# Altium PCB ZD-STM32-ZOUYU.PcbDoc (part 7 of 8)
Units mm, origin at the board's own origin, x right, y up, seen from the top; angles counter-clockwise.
Board outline 251.84 x 139.06 mm, 2 copper layers (Top Layer, Bottom Layer); 254 components, 246 nets, 1172 pads, 599 vias.
Unrouted connection lines stored in the file: 9.
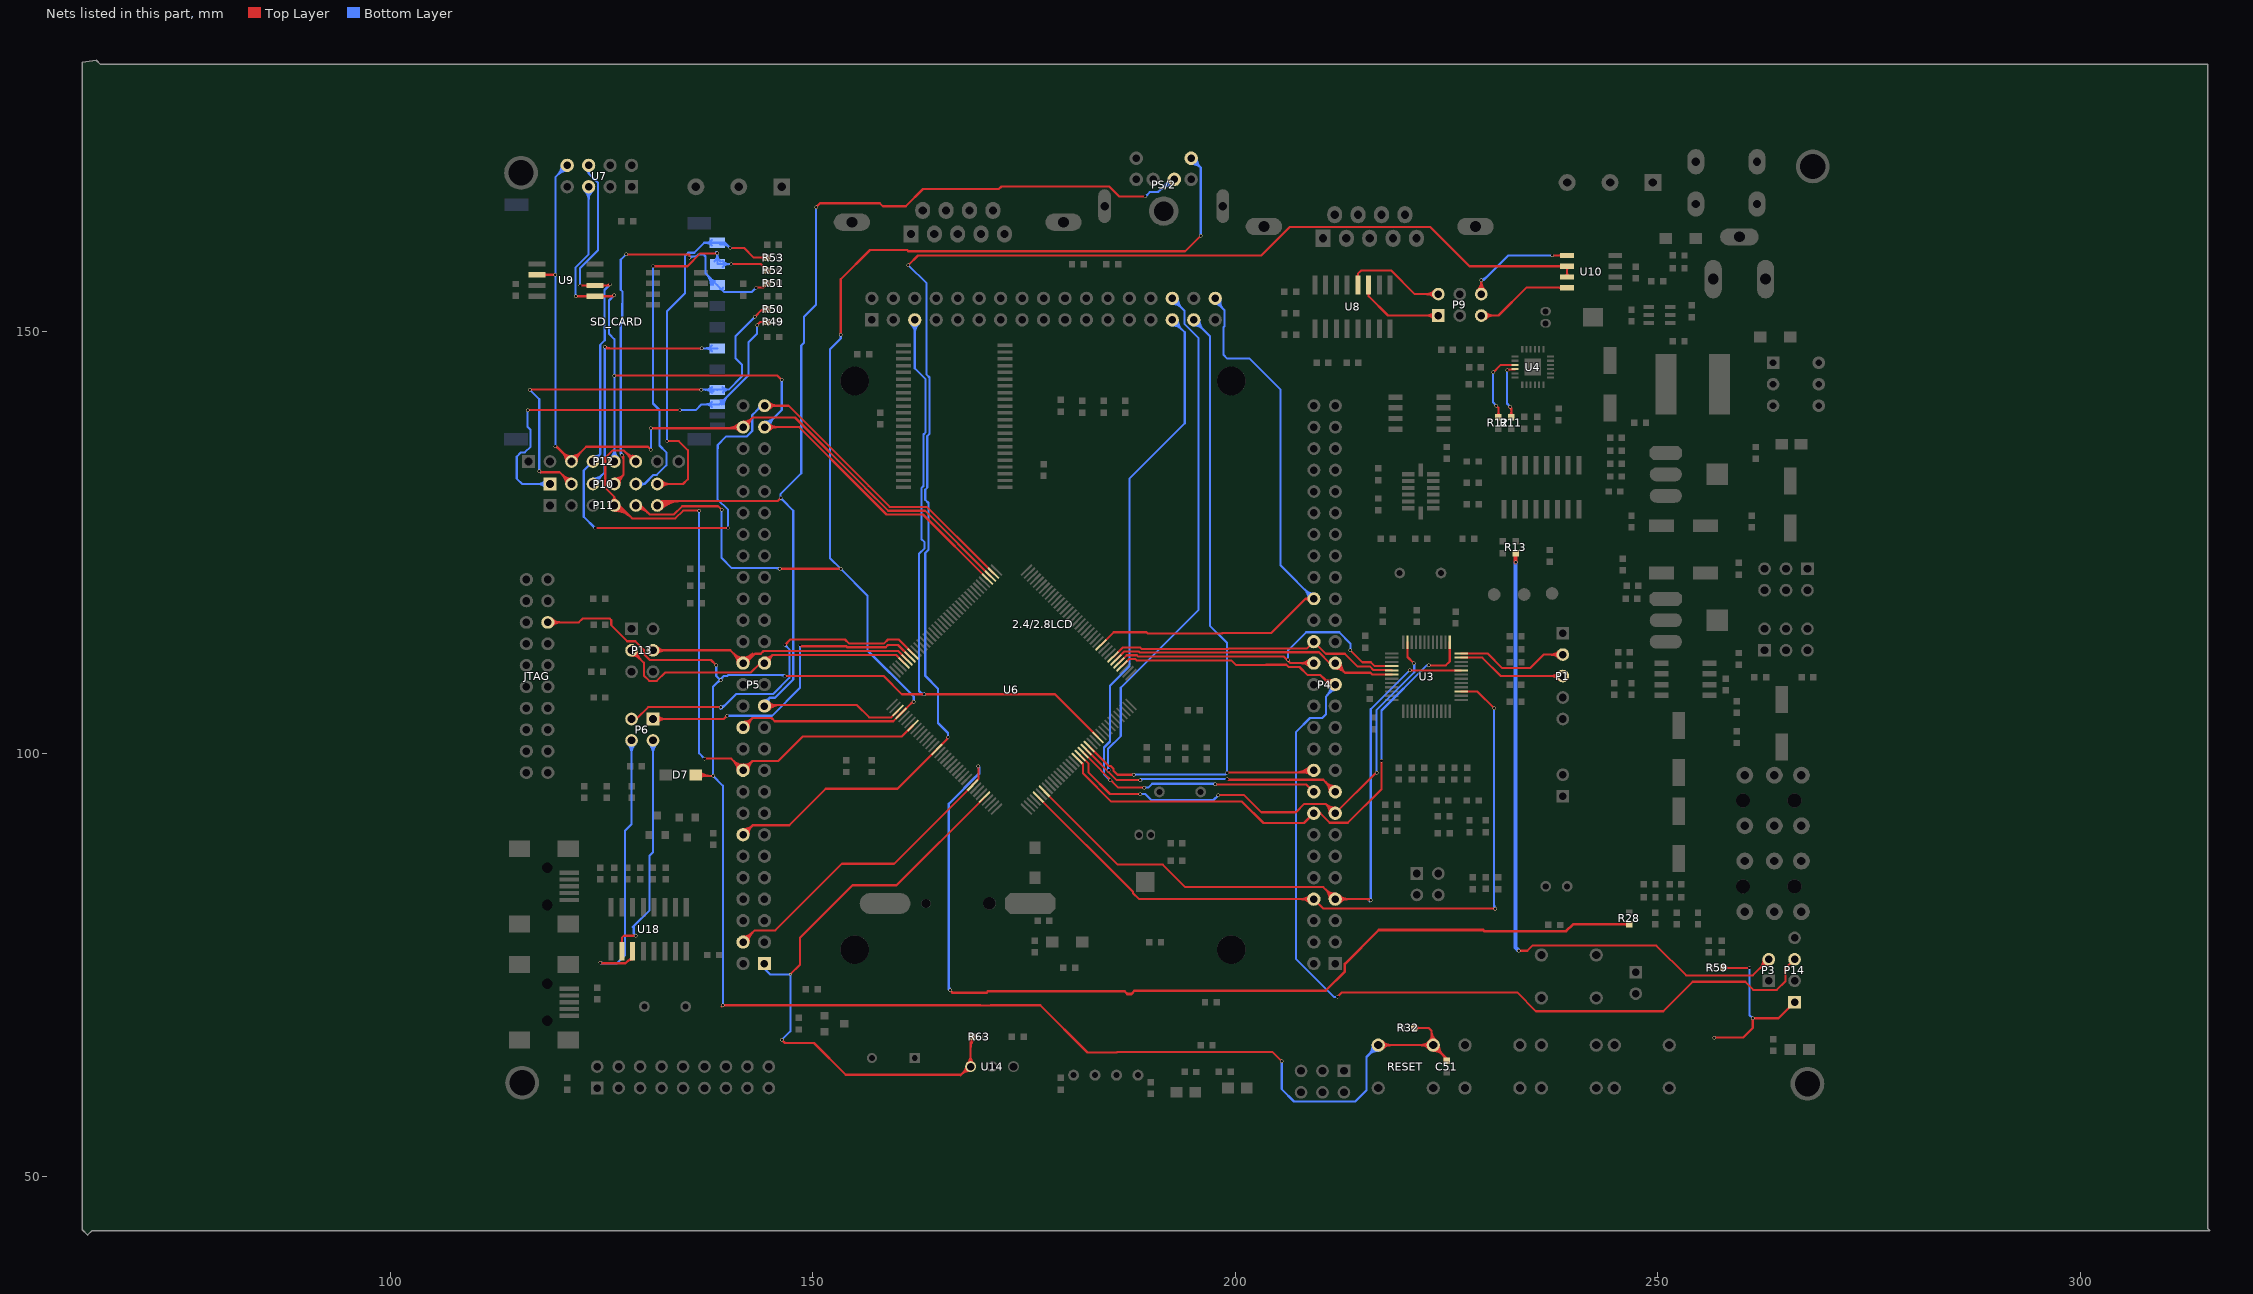
[diagram p7: the nets of this part, all layers, seen from the top]

## Via types
v1: diameter 0.4, hole 0.3, Top Layer to Bottom Layer, 598 vias
v2: diameter 0.3, hole 0.2, Top Layer to Bottom Layer, 1 vias

## Nets (pads, with @x,y where several pads share a name; then routed paths per layer and width w, separated by ;. In a path a pad name is that pad's centre, name@x,y a point inside that pad or via, vN(x,y) a via of type N, cw(c..) or ccw(c..) an arc to the next point about the centre after c; other vN are vias at no path point) (continued)
PA4: P4.27 P14.3 U6.40 | length 134.4
  Top Layer w0.254: U6.40@186.58,110.436 186.645,110.436 187.445,111.236 188.157,111.236 188.312,111.081 199.517,111.081 200.054,110.544 203.642,110.544 203.66,110.562 206.042,110.562 206.303,110.301 207.598,110.301 208.57,109.329 210.076,109.329 211.19,108.215 P4.27@211.825,108.215 ; 210.393,109.012 ccw(c211.11,109.728) P4.27@211.543,108.812 ; 210.648,108.757 ccw(c211.274,109.382) P4.27@211.652,108.582 ; 210.904,108.501 ccw(c211.438,109.035) P4.27@211.76,108.353 ; v1(212.09,71.247) 212.617,71.774 233.348,71.774 235.57,69.552 250.654,69.552 254.131,73.029 260.353,73.029 261.307,72.075 264.099,72.075 265.115,73.091 265.115,74.615 P14.3@266.192,75.692
  Bottom Layer w0.254: 210.866,106.945 ccw(c210.025,107.786) P4.27@211.183,108.062 ; 211.188,107.266 ccw(c210.544,107.91) P4.27@211.43,108.121 ; 211.229,107.307 cw(c211.825,106.711) P4.27@211.825,107.554 ; P4.27@211.825,108.215 211.825,107.904 210.711,106.789 210.711,104.666 210.294,104.249 208.824,104.249 207.19,102.616 207.19,75.714 211.657,71.247 v1(212.09,71.247)
PA5: P4.30 U3.28 U6.41 | length 45
  Top Layer w0.254: U6.41@186.226,110.789 187.127,111.69 188.345,111.69 188.5,111.535 205.711,111.535 206.491,110.755 209.18,110.755 P4.30@209.285,110.755 ; 205.907,111.339 ccw(c206.248,111.681) v1@206.248,111.198 ; v1@206.321,111.118 ccw(c206.691,111.081) 206.428,110.818 ; P4.30@208.818,110.288 ccw(c207.691,109.16) 207.691,110.755 ccw(c207.691,112.349) P4.30@208.818,111.222 ; P4.30@208.998,110.467 ccw(c208.304,109.774) 208.304,110.755 ccw(c208.304,111.736) P4.30@208.998,111.042 ; v1(213.614,112.268) 215.03,110.852 216.043,110.852 216.499,110.396 U3.28@218.527,110.396
  Bottom Layer w0.254: v1(206.248,111.125) 206.248,112.268 208.389,114.409 212.287,114.409 213.614,113.082 v1(213.614,112.268)
PA6: P4.29 U3.30 U6.42 | length 38.3
  Top Layer w0.254: U6.42@185.873,111.143 186.874,112.144 188.533,112.144 188.688,111.989 199.351,111.989 199.405,112.043 209.895,112.043 211.183,110.755 P4.29@211.825,110.755 212.96,109.62 215.991,109.62 216.215,109.396 U3.30@218.527,109.396 ; P4.29@211.825,110.094 cw(c211.825,108.5) 212.953,109.627 cw(c214.08,110.755) P4.29@212.486,110.755 ; P4.29@211.825,110.348 cw(c211.825,109.367) 212.519,110.061 cw(c213.213,110.755) P4.29@212.232,110.755
PA7: P4.32 U3.29 U6.43 | length 35.3
  Top Layer w0.254: U6.43@185.519,111.496 185.584,111.496 186.686,112.598 188.721,112.598 188.876,112.443 199.163,112.443 199.217,112.497 208.488,112.497 P4.32@209.285,113.295 210.711,111.869 212.94,111.869 214.446,110.363 215.89,110.363 216.311,109.942 218.481,109.942 U3.29@218.527,109.896
PA9: P6.3 U6.101 | length 42.2
  Top Layer w0.254: P6.3@128.524,104.14 129.102,104.14 130.499,105.537 v1(139.065,105.537) ; v1(146.685,112.903) 147.32,113.538 153.797,113.538 154.248,113.087 158.426,113.087 158.877,113.538 160.143,113.538 U6.101@161.831,111.85
  Bottom Layer w0.254: v1@139.065,105.356 ccw(c139.065,105.618) 139.25,105.433 ; v1(139.065,105.537) 139.355,105.537 140.918,107.1 145.311,107.1 147.212,109.002 147.212,112.376 v1(146.685,112.903) ; v1@139.065,105.61 ccw(c139.065,106.485) 139.684,105.866
PA10: P6.1 U6.102 | length 41.6
  Top Layer w0.254: P6.1@131.064,104.14 139.446,104.14 v1(139.827,104.521) ; P6.1@131.325,103.879 cw(c131.955,103.249) 131.955,104.14 cw(c131.955,105.031) P6.1@131.325,104.401 ; P6.1@131.505,103.699 cw(c132.568,102.636) 132.568,104.14 cw(c132.568,105.644) P6.1@131.505,104.581 ; v1(148.463,112.903) 148.609,112.757 153.936,112.757 154.06,112.633 158.614,112.633 158.884,112.903 160.071,112.903 U6.102@161.477,111.496
  Bottom Layer w0.254: v1(139.827,104.521) 145.161,104.521 148.463,107.823 v1(148.463,112.903)
PA11: P5.30 P13.4 U6.103 | length 43.6
  Top Layer w0.254: P13.4@131.064,112.268 140.208,112.268 P5.30@141.721,110.755 142.032,110.755 143.147,111.869 143.835,111.869 144.145,112.179 160.088,112.179 U6.103@161.124,111.143 ; P13.4@131.325,112.007 cw(c131.955,111.377) 131.955,112.268 cw(c131.955,113.159) P13.4@131.325,112.529 ; P13.4@131.505,111.827 cw(c132.568,110.764) 132.568,112.268 cw(c132.568,113.772) P13.4@131.505,112.709 ; P5.30@141.061,110.755 ccw(c139.466,110.755) 140.594,111.882 ccw(c141.721,113.01) 141.721,111.415 ccw(c141.721,113.01) 142.849,111.882 ccw(c143.976,110.755) P5.30@142.382,110.755 ; P5.30@141.315,110.755 ccw(c140.334,110.755) 141.027,111.449 ccw(c141.721,112.142) 141.721,111.161 ccw(c141.721,112.142) 142.415,111.449 ccw(c143.109,110.755) P5.30@142.128,110.755
PA12: P5.29 P13.3 U6.104 | length 43.1
  Top Layer w0.254: P13.3@128.524,111.645 cw(c128.524,110.141) 129.588,111.204 cw(c130.651,112.268) P13.3@129.147,112.268 ; P13.3@128.524,111.899 cw(c128.524,111.008) 129.154,111.638 cw(c129.784,112.268) P13.3@128.893,112.268 ; P13.3@128.524,112.268 129.987,110.805 129.987,109.282 130.618,108.651 131.51,108.651 132.5,109.64 142.648,109.64 143.762,110.755 P5.29@144.261,110.755 145.231,111.725 159.835,111.725 U6.104@160.77,110.789 ; P5.29@144.313,111.158 ccw(c144.394,111.793) 144.847,111.34 ccw(c145.299,110.888) P5.29@144.664,110.806 ; P5.29@144.345,111.41 ccw(c144.477,112.441) 145.212,111.706 ccw(c145.948,110.971) P5.29@144.916,110.839
PB1: 2.4/2.8LCD.34 P4.36 U6.47 | length 77.3
  Top Layer w0.254: U6.47@184.105,112.911 185.608,114.414 189.473,114.414 189.628,114.259 198.411,114.259 198.465,114.313 204.243,114.313 208.294,118.364 ; P4.36@208.722,118.093 ccw(c208.294,117.891) 208.294,118.364 ; P4.36@208.722,118.635 cw(c208.294,118.837) 208.294,118.364 ; P4.36@209.296,118.364 208.294,118.364
  Bottom Layer w0.254: 2.4/2.8LCD.34@197.612,153.264 cw(c197.612,152.421) 198.208,153.017 ; 2.4/2.8LCD.34@197.612,153.924 197.612,153.613 198.726,152.498 198.726,150.622 198.609,150.505 198.609,147.229 199.045,146.793 201.685,146.793 205.359,143.119 205.359,122.301 P4.36@209.296,118.364 ; 2.4/2.8LCD.34@198.007,153.83 ccw(c198.893,153.619) 198.249,152.976 ; 2.4/2.8LCD.34@198.254,153.771 ccw(c199.412,153.496) 198.571,152.654 ; P4.36@208.661,118.364 ccw(c207.128,118.364) 208.212,119.448 ccw(c209.296,120.532) P4.36@209.296,118.999 ; P4.36@208.915,118.364 ccw(c207.995,118.364) 208.646,119.014 ccw(c209.296,119.665) P4.36@209.296,118.745
PB6: P5.4 R28.1 U6.136 | length 156.5
  Top Layer w0.254: P5.4@141.721,77.735 143.107,79.121 145.542,79.121 153.416,86.995 159.603,86.995 U6.136@168.902,96.294 168.902,96.359 169.602,97.058 169.602,98.495 v1(169.545,98.552) ; P5.4@141.721,78.141 ccw(c141.721,79.122) 142.415,78.429 ccw(c143.109,77.735) P5.4@142.128,77.735 ; P5.4@141.721,78.395 ccw(c141.721,79.99) 142.849,78.862 ccw(c143.976,77.735) P5.4@142.382,77.735 ; v1@169.493,98.5 cw(c169.232,98.239) 169.602,98.239
  Top Layer w0.3: v1(166.243,72.009) 166.497,71.755 170.561,71.755 170.711,71.905 186.905,71.905 187.224,71.586 187.68,71.586 188.061,71.967 210.667,71.967 212.963,74.262 212.963,75.152 216.974,79.163 229.336,79.163 229.474,79.025 239.161,79.025 239.968,79.832 R28.1@246.634,79.832 ; R28.1@246.471,79.669 ccw(c246.076,79.275) 246.076,79.832 ccw(c246.076,80.39) R28.1@246.471,79.996
  Bottom Layer w0.3: 166.074,72.538 ccw(c166.772,72.538) v1@166.278,72.044 ; v1(166.243,72.009) 166.074,72.178 166.074,94.081 169.672,97.679 169.672,98.425 v1(169.545,98.552) ; v1@169.51,98.517 cw(c169.118,98.125) 169.672,98.125
PB9: P5.1 R63.1 U6.140 U14.1 | length 80.9
  Top Layer w0.254: v1(146.304,66.167) 146.685,65.786 150.114,65.786 153.87,62.03 167.516,62.03 168.478,62.992 U14.1@168.656,62.992 168.656,66.218 R63.1@168.986,66.548 ccw(c169.783,65.751) 168.656,65.751 ; v2(147.32,73.914) 148.463,75.057 148.463,78.232 154.686,84.455 159.892,84.455 U6.140@170.316,94.879 ; 167.459,61.973 cw(c168.656,60.777) U14.1@168.656,62.469 ; 167.889,62.403 ccw(c167.3,62.992) U14.1@168.133,62.992 ; 167.893,62.407 cw(c168.656,61.644) U14.1@168.656,62.723 ; U14.1@168.286,63.362 ccw(c167.393,64.255) 168.656,64.255 ccw(c169.919,64.255) U14.1@169.026,63.362 ; 168.656,65.138 cw(c170.397,65.138) R63.1@169.166,66.368
  Bottom Layer w0.254: P5.1@144.261,75.195 144.261,74.56 144.907,73.914 v2(147.32,73.914) 147.32,67.183 v1(146.304,66.167)
PB13: P5.53 P12.4 U6.74 U7.5 U9.6 | length 132.6
  Top Layer w0.254: v1(122.428,155.448) U9.6@124.206,155.448 125.857,155.448 v1(125.984,155.575) ; U9.6@123.369,155.322 ccw(c123.066,155.019) 123.066,155.448 ccw(c123.066,155.877) U9.6@123.369,155.574 ; v1(124.206,126.746) v1(139.954,126.746) v1@140.081,126.746 ; U9.6@125.043,155.322 cw(c125.346,155.019) 125.346,155.448 cw(c125.346,155.877) U9.6@125.043,155.574 ; 125.501,155.448 ccw(c125.501,156.058) v1@125.932,155.627 ; P5.53@144.272,141.224 147.115,141.224 156.594,131.745 156.594,131.733 159.079,129.248 163.487,129.248 170.434,122.301 ; P5.53@144.541,140.955 cw(c145.192,140.304) 145.192,141.224 cw(c145.192,142.144) P5.53@144.541,141.493 ; P5.53@144.721,140.775 cw(c145.805,139.691) 145.805,141.224 cw(c145.805,142.757) P5.53@144.721,141.673 ; 169.456,123.317 U6.74@171.377,121.396 170.281,122.492
  Bottom Layer w0.254: v1(122.428,155.448) 122.428,157.48 124.558,159.61 124.558,167.594 123.444,168.708 ; U7.5@123.205,169.056 cw(c123.071,168.708) 123.444,168.708 ; U7.5@123.444,169.672 123.444,168.708 ; U7.5@123.683,169.056 ccw(c123.817,168.708) 123.444,168.708 ; P12.4@124.046,135.236 ccw(c124.183,136.129) 124.822,135.49 ; v1(124.206,126.746) 122.875,128.077 122.875,133.543 P12.4@123.952,134.62 124.822,135.49 ; P12.4@124.568,134.714 cw(c125.461,134.851) 124.822,135.49 ; v1(125.984,155.575) 125.33,154.921 125.33,150.119 125.349,150.1 125.349,148.954 124.822,148.427 124.822,135.49 ; v1(139.954,126.746) 139.954,128.888 138.684,130.158 138.684,136.15 138.722,136.188 138.722,136.571 139.746,137.595 142.183,137.595 142.821,138.233 142.821,140.131 143.275,140.585 143.275,140.589 143.91,141.224 P5.53@144.272,141.224 ; 143.378,140.692 cw(c143.898,140.173) P5.53@144.144,140.865 ; 143.444,140.758 ccw(c142.978,141.224) P5.53@143.637,141.224
PB14: P5.52 P12.3 U6.75 U7.7 U9.2 | length 119.9
  Top Layer w0.254: U9.2@117.348,156.716 v1(119.505,156.716) ; U9.2@118.185,156.591 cw(c118.488,156.287) 118.488,156.716 cw(c118.488,157.146) U9.2@118.185,156.842 ; v1@119.505,136.327 cw(c119.505,135.844) 119.847,136.185 ; v1(119.505,136.4) 119.632,136.4 P12.3@121.412,134.62 123.155,136.363 130.464,136.363 v1(130.81,136.017) ; P12.3@120.789,134.62 ccw(c119.285,134.62) 120.348,135.684 ccw(c121.412,136.747) 121.412,135.243 ccw(c121.412,136.747) 122.476,135.684 ccw(c123.539,134.62) P12.3@122.035,134.62 ; P12.3@121.043,134.62 ccw(c120.152,134.62) 120.782,135.25 ccw(c121.412,135.88) 121.412,134.989 ccw(c121.412,135.88) 122.042,135.25 ccw(c122.672,134.62) P12.3@121.781,134.62 ; v1(130.81,138.557) 141.605,138.557 P5.52@141.732,138.684 142.875,139.827 147.87,139.827 156.14,131.557 156.14,131.545 158.891,128.794 163.272,128.794 U6.75@171.023,121.042 ; 139.892,138.557 ccw(c139.892,140.524) P5.52@141.283,139.133 ; P5.52@141.283,138.235 ccw(c140.506,137.458) 140.506,138.557 ccw(c140.506,139.91) P5.52@141.463,138.953 ; P5.52@141.732,139.065 ccw(c141.732,139.985) 142.382,139.334 ccw(c143.033,138.684) P5.52@142.113,138.684 ; P5.52@141.732,139.319 ccw(c141.732,140.852) 142.816,139.768 ccw(c143.9,138.684) P5.52@142.367,138.684
  Bottom Layer w0.254: v1(119.505,136.4) v1(119.505,156.716) 119.505,168.273 U7.7@120.904,169.672 ; U7.7@120.244,169.672 cw(c118.649,169.672) 119.777,168.545 cw(c120.904,167.417) U7.7@120.904,169.012 ; U7.7@120.498,169.672 cw(c119.516,169.672) 120.21,168.978 cw(c120.904,168.284) U7.7@120.904,169.266 ; v1(130.81,136.017) v1(130.81,138.557)
PB15: P5.51 P12.5 U6.76 U7.6 U9.5 | length 116.3
  Top Layer w0.254: v1(121.92,154.178) U9.5@124.206,154.178 126.365,154.178 v1(126.492,154.305) ; U9.5@123.369,154.052 ccw(c123.066,153.749) 123.066,154.178 ccw(c123.066,154.607) U9.5@123.369,154.304 ; U9.5@125.043,154.052 cw(c125.346,153.749) 125.346,154.178 cw(c125.346,154.607) U9.5@125.043,154.304 ; 126.009,154.178 ccw(c126.009,154.788) v1@126.44,154.357 ; v1(126.492,144.78) 145.796,144.78 v1(146.304,144.272) ; P5.51@144.272,138.684 148.371,138.684 155.686,131.369 155.686,131.357 158.703,128.34 163.019,128.34 U6.76@170.67,120.689 ; P5.51@144.541,138.415 cw(c145.192,137.764) 145.192,138.684 cw(c145.192,139.604) P5.51@144.541,138.953 ; P5.51@144.721,138.235 cw(c145.805,137.151) 145.805,138.684 cw(c145.805,140.217) P5.51@144.721,139.133
  Bottom Layer w0.254: 121.901,154.4 ccw(c122.142,154.4) v1@121.972,154.23 ; v1(121.92,154.178) 121.901,154.197 121.901,157.595 123.444,159.138 U7.6@123.444,167.132 ; U7.6@122.977,166.665 cw(c121.85,165.538) 123.444,165.538 cw(c125.038,165.538) U7.6@123.911,166.665 ; U7.6@123.157,166.845 cw(c122.463,166.151) 123.444,166.151 cw(c124.425,166.151) U7.6@123.731,166.845 ; P12.5@126.051,135.061 ccw(c124.988,136.124) 126.492,136.124 ccw(c127.996,136.124) P12.5@126.933,135.061 ; P12.5@126.231,134.881 ccw(c125.601,135.511) 126.492,135.511 ccw(c127.383,135.511) P12.5@126.753,134.881 ; P12.5@126.492,134.62 v1(126.492,144.78) 126.492,149.098 125.857,149.733 125.857,153.67 v1(126.492,154.305) ; P5.51@144.272,138.684 146.304,140.716 v1(146.304,144.272) ; P5.51@144.272,139.065 ccw(c144.272,139.985) 144.922,139.334 ccw(c145.573,138.684) P5.51@144.653,138.684 ; P5.51@144.272,139.319 ccw(c144.272,140.852) 145.356,139.768 ccw(c146.44,138.684) P5.51@144.907,138.684
PC10: P5.25 P11.6 PS/2.1 U6.111 | length 158
  Top Layer w0.254: P11.6@131.474,129.511 cw(c132.463,128.522) 132.463,129.921 ; P11.6@131.572,129.413 132.08,129.921 145.796,129.921 v1(146.177,130.302) ; P11.6@131.653,129.332 cw(c133.076,127.909) 133.076,129.921 ; P11.6@131.833,129.152 cw(c133.689,127.296) 133.689,129.921 ; P11.6@132.013,128.972 cw(c134.302,126.683) 134.302,129.921 ; P5.25@144.261,105.675 144.377,105.791 155.194,105.791 156.653,104.332 159.263,104.332 U6.111@160.063,105.132 ; P5.25@144.549,105.387 cw(c145.523,104.413) 145.523,105.791 ; P5.25@144.728,105.208 cw(c146.136,103.8) 146.136,105.791 ; P5.25@144.728,106.142 ccw(c145.575,106.989) 145.575,105.791 ; v1(150.368,164.719) 150.841,165.192 157.913,165.192 158.278,164.827 160.992,164.827 163.032,166.867 172.002,166.867 172.308,167.173 185.084,167.173 186.268,165.989 v1(189.357,165.989)
  Bottom Layer w0.254: P5.25@144.261,105.675 144.261,106.051 144.857,106.646 ; P5.25@144.261,106.335 ccw(c144.261,107.022) 144.746,106.536 ; P5.25@144.595,105.907 cw(c144.932,106.141) 144.642,106.432 ; P5.25@144.804,106.052 cw(c145.186,106.317) 144.857,106.646 ; v1(150.368,164.719) 150.368,153.169 148.936,151.737 148.936,148.675 148.606,148.345 148.606,133.216 146.177,130.787 v1(146.177,130.302) 146.177,130.199 146.236,130.14 146.329,130.14 147.666,128.803 147.666,108.814 145.499,106.646 144.857,106.646 ; v1(189.357,165.989) 189.865,166.497 190.814,166.497 192.329,168.012 PS/2.1@192.766,168.012 ; 190.871,166.554 cw(c192.766,164.659) PS/2.1@192.766,167.339 ; 191.304,166.988 cw(c192.766,165.526) PS/2.1@192.766,167.593 ; 191.738,167.421 cw(c192.766,166.393) PS/2.1@192.766,167.847 ; 191.926,167.61 ccw(c191.524,168.012) PS/2.1@192.093,168.012
PC11: P5.24 P11.5 PS/2.5 U6.112 | length 173.9
  Top Layer w0.254: P11.5@129.032,129.413 129.606,129.413 130.683,128.336 133.524,128.336 134.512,129.324 138.773,129.324 v1(139.192,128.905) ; P11.5@129.037,129.298 cw(c129.104,127.813) 130.155,128.864 ; P11.5@129.049,129.044 cw(c129.139,127.033) 130.562,128.457 ; P5.24@141.721,103.135 142.836,104.249 ; P5.24@141.725,103.541 ccw(c141.732,104.495) 142.407,103.821 ccw(c143.081,103.146) P5.24@142.128,103.138 ; P5.24@141.727,103.795 ccw(c141.739,105.345) 142.836,104.249 ; P5.24@142.382,103.14 cw(c143.932,103.153) 142.836,104.249 ; v1(146.05,121.92) v1(153.289,121.92) ; v1(153.289,149.606) 153.289,156.193 156.754,159.658 161.127,159.658 161.273,159.512 194.056,159.512 v1(195.893,161.349) ; 161.604,105.966 cw(c161.925,105.645) v1@161.925,106.099 ; v1@161.81,106.172 U6.112@160.417,104.779 159.516,103.878 145.464,103.878 145.094,104.249 142.836,104.249
  Bottom Layer w0.254: v1(139.192,128.905) 139.192,123.19 140.389,121.993 145.977,121.993 v1(146.05,121.92) ; 145.698,121.993 cw(c145.698,121.568) v1@145.998,121.868 ; v1(153.289,149.606) 153.289,149.168 152.005,147.884 152.005,123.204 v1(153.289,121.92) 156.464,118.745 156.464,112.254 161.925,106.793 v1(161.925,106.172) ; PS/2.5@194.766,170.512 195.893,169.385 ; PS/2.5@194.772,170.093 cw(c194.785,169.128) 195.468,169.81 cw(c196.15,170.493) PS/2.5@195.185,170.506 ; PS/2.5@194.775,169.839 cw(c194.797,168.289) 195.893,169.385 ; PS/2.5@195.439,170.503 ccw(c196.989,170.481) 195.893,169.385 ; v1(195.893,161.349) 195.893,169.385
PC13: P4.7 U3.8 U6.7 | length 88
  Top Layer w0.254: U6.7@177.387,95.587 186.08,86.893 191.421,86.893 194.074,84.24 210.4,84.24 P4.7@211.825,82.815 215.889,82.815 v1(216.027,82.677) ; P4.7@211.165,82.815 ccw(c209.57,82.815) 210.698,83.942 ccw(c211.825,85.07) P4.7@211.825,83.475 ; P4.7@211.419,82.815 ccw(c210.438,82.815) 211.131,83.509 ccw(c211.825,84.202) P4.7@211.825,83.221 ; P4.7@212.113,82.527 cw(c212.806,81.834) 212.806,82.815 cw(c212.806,83.796) P4.7@212.113,83.102 ; P4.7@212.292,82.348 cw(c213.42,81.22) 213.42,82.815 cw(c213.42,84.409) P4.7@212.292,83.282 ; 215.518,82.815 cw(c215.518,82.168) v1@215.975,82.625 ; v1@220.599,109.855 v1(220.64,109.896) U3.8@226.727,109.896
  Bottom Layer w0.254: v1@215.9,82.55 v1(216.027,82.677) 216.027,105.283 v1(220.64,109.896)
PD2: P5.20 P11.4 P12.6 U6.116 | length 97.4
  Top Layer w0.254: P11.4@126.209,129.968 ccw(c125.974,130.43) 126.492,130.43 ; P11.4@126.492,128.79 cw(c126.492,125.9) 128.535,127.944 ; P11.4@126.492,129.044 cw(c126.492,126.767) 128.102,128.377 ; P11.4@126.492,129.298 cw(c126.492,127.634) 127.668,128.811 ; P11.4@126.492,129.552 cw(c126.492,128.502) 127.235,129.244 ; P11.4@126.775,129.968 cw(c127.01,130.43) 126.492,130.43 ; 127.723,135.785 ccw(c129.032,137.094) P12.6@129.032,135.243 ; 128.07,135.438 cw(c127.252,134.62) P12.6@128.409,134.62 ; 128.157,135.352 ccw(c129.032,136.227) P12.6@129.032,134.989 ; P12.6@129.032,134.62 128.888,134.62 127.599,135.909 126.258,135.909 125.415,135.066 125.415,131.507 126.492,130.43 ; v1(136.525,128.797) 134.627,128.797 133.712,127.882 128.597,127.882 127.066,129.413 P11.4@126.492,129.413 126.492,130.43 ; v1(137.16,99.441) 140.335,99.441 P5.20@141.721,98.055 142.836,99.169 ; P5.20@141.061,98.055 ccw(c139.466,98.055) 140.594,99.182 ccw(c141.721,100.31) P5.20@141.721,98.715 ; P5.20@141.315,98.055 ccw(c140.334,98.055) 141.027,98.749 ccw(c141.721,99.442) P5.20@141.721,98.461 ; P5.20@141.725,98.461 ccw(c141.732,99.415) 142.407,98.741 ccw(c143.081,98.066) P5.20@142.128,98.058 ; P5.20@141.727,98.715 ccw(c141.739,100.265) 142.836,99.169 ; P5.20@142.382,98.06 cw(c143.932,98.073) 142.836,99.169 ; U6.116@161.831,103.365 160.529,102.062 148.798,102.062 145.905,99.169 142.836,99.169
  Bottom Layer w0.254: v1(136.525,128.797) 136.525,100.076 v1(137.16,99.441)
PE6: P4.8 U3.3 U6.5 | length 92.9
  Top Layer w0.254: U6.5@176.68,94.879 187.887,83.673 187.887,83.531 188.603,82.815 P4.8@209.285,82.815 210.4,81.7 230.72,81.7 v1(230.759,81.661) ; P4.8@208.818,82.348 ccw(c207.691,81.22) 207.691,82.815 ccw(c207.691,84.409) P4.8@208.818,83.282 ; P4.8@208.998,82.527 ccw(c208.304,81.834) 208.304,82.815 ccw(c208.304,83.796) P4.8@208.998,83.102 ; U3.3@226.727,107.396 228.646,107.396 v1(230.632,105.41) ; 230.488,81.7 cw(c230.488,81.39) v1@230.707,81.609
  Bottom Layer w0.254: 230.632,82.144 ccw(c231.242,82.144) v1@230.811,81.713 ; v1(230.632,105.41) 230.632,81.788 v1(230.759,81.661)
PF6: P4.16 U3.13 U6.18 | length 64.8
  Top Layer w0.254: U6.18@181.276,99.476 181.976,98.776 181.976,97.678 185.293,94.361 200.787,94.361 203.327,91.821 208.131,91.821 P4.16@209.285,92.975 210.051,92.975 211.165,91.86 213.321,91.86 217.297,95.837 v1(217.297,99.187) ; U6.18@181.823,98.929 cw(c181.746,98.713) 181.976,98.713 ; v1(222.885,110.49) 224.917,110.49 225.377,110.95 U3.13@225.377,113.246
  Bottom Layer w0.254: v1(217.297,99.187) 217.297,105.139 222.648,110.49 v1(222.885,110.49)
PF7: P4.15 U3.23 U6.19 | length 63.4
  Top Layer w0.254: U6.19@181.63,99.829 182.626,98.833 182.626,97.79 185.166,95.25 v1(188.722,95.25) ; v1(197.993,95.123) 201.041,95.123 203.073,93.091 207.173,93.091 208.171,94.089 210.711,94.089 ; P4.15@211.165,92.98 ccw(c209.615,92.993) 210.711,94.089 ; P4.15@211.419,92.978 ccw(c210.465,92.986) 211.139,93.661 ccw(c211.814,94.335) P4.15@211.822,93.381 ; P4.15@211.82,93.635 cw(c211.807,95.185) 210.711,94.089 ; v1@216.662,97.812 P4.15@211.825,92.975 210.711,94.089 ; U3.23@220.377,113.246 220.377,111.474 v1(221.107,110.744)
  Bottom Layer w0.254: v1(188.722,95.25) 189.338,95.25 190.046,94.542 197.412,94.542 v1(197.993,95.123) ; v1(216.725,97.79) 216.725,105.219 221.167,109.661 221.167,110.684 v1(221.107,110.744)
PF8: 2.4/2.8LCD.29 P4.18 U6.20 | length 94
  Top Layer w0.254: U6.20@181.983,100.183 186.154,96.012 v1(189.23,96.012) ; 184.971,97.195 cw(c184.677,96.901) v1@185.093,96.901 ; v1@185.166,96.828 cw(c185.166,96.412) 185.46,96.706 ; v1(197.612,96.393) 208.407,96.393 P4.18@209.285,95.515
  Bottom Layer w0.254: v1(185.166,96.901) 184.458,97.609 184.458,100.772 185.166,101.48 185.166,108.06 187.452,110.346 187.452,132.588 194.002,139.138 194.002,149.914 2.4/2.8LCD.29@192.532,151.384 ; v1(189.23,96.012) 189.702,96.012 190.156,96.466 197.539,96.466 v1(197.612,96.393) ; 2.4/2.8LCD.29@192.532,150.724 cw(c192.532,149.129) 193.659,150.257 cw(c194.787,151.384) 2.4/2.8LCD.29@193.192,151.384 ; 2.4/2.8LCD.29@192.532,150.978 cw(c192.532,149.996) 193.226,150.69 cw(c193.92,151.384) 2.4/2.8LCD.29@192.938,151.384 ; 197.26,96.466 cw(c197.26,96.041) v1@197.56,96.341
PF9: 2.4/2.8LCD.30 P4.17 U6.21 | length 103
  Top Layer w0.254: U6.21@182.337,100.536 185.972,96.901 v1(188.722,96.901) ; v1(199.009,97.028) 199.097,96.94 210.4,96.94 P4.17@211.825,95.515 ; v1@199.061,97.08 ccw(c199.397,97.416) 199.397,96.94 ; P4.17@211.165,95.515 ccw(c209.57,95.515) 210.698,96.642 ccw(c211.825,97.77) P4.17@211.825,96.175 ; P4.17@211.419,95.515 ccw(c210.438,95.515) 211.131,96.209 ccw(c211.825,96.902) P4.17@211.825,95.921
  Bottom Layer w0.254: 184.912,98.527 ccw(c185.522,98.527) v1@185.091,98.096 ; v1(185.039,98.044) 184.912,97.917 184.912,100.584 186.436,102.108 186.436,107.84 195.655,117.059 195.655,149.225 193.958,150.922 193.958,152.498 2.4/2.8LCD.30@192.532,153.924 ; v1(188.722,96.901) 188.849,97.028 v1(199.009,97.028) ; v1@188.774,96.849 cw(c189.205,96.418) 189.205,97.028 ; 2.4/2.8LCD.30@192.532,153.264 cw(c192.532,151.669) 193.659,152.797 cw(c194.787,153.924) 2.4/2.8LCD.30@193.192,153.924 ; 2.4/2.8LCD.30@192.532,153.518 cw(c192.532,152.536) 193.226,153.23 cw(c193.92,153.924) 2.4/2.8LCD.30@192.938,153.924
PF10: 2.4/2.8LCD.31 P4.20 U6.22 | length 93
  Top Layer w0.254: U6.22@182.691,100.89 185.009,98.571 185.257,98.571 185.566,98.262 185.566,98.014 186.044,97.536 v1(187.96,97.536) ; v1(199.009,97.79) 209.02,97.79 P4.20@209.285,98.055 ; 207.052,97.79 ccw(c207.052,100.288) P4.20@208.818,98.522 ; 207.665,97.79 ccw(c207.665,99.675) P4.20@208.998,98.342 ; 208.278,97.79 ccw(c208.278,99.062) P4.20@209.177,98.163 ; 208.33,97.79 cw(c208.33,97.1) P4.20@208.818,97.588
  Bottom Layer w0.254: v1(187.96,97.536) 187.979,97.555 198.774,97.555 v1(199.009,97.79) 199.028,97.809 199.028,113.138 196.977,115.189 196.977,149.479 2.4/2.8LCD.31@195.072,151.384 ; v1@188.012,97.484 cw(c188.182,97.314) 188.182,97.555 ; 2.4/2.8LCD.31@195.072,150.724 cw(c195.072,149.129) 196.199,150.257 cw(c197.327,151.384) 2.4/2.8LCD.31@195.732,151.384 ; 2.4/2.8LCD.31@195.072,150.978 cw(c195.072,149.996) 195.766,150.69 cw(c196.46,151.384) 2.4/2.8LCD.31@195.478,151.384 ; v1@198.957,97.842 ccw(c198.787,98.012) 199.028,98.012
PG9: P5.14 U6.124 U10.2 U10.3 | length 177.3
  Top Layer w0.254: P5.14@141.721,90.435 142.853,91.567 147.193,91.567 151.511,95.885 160.008,95.885 U6.124@164.659,100.536 165.989,101.866 v1(165.989,101.981) ; P5.14@141.721,90.841 ccw(c141.721,91.822) 142.415,91.129 ccw(c143.109,90.435) P5.14@142.128,90.435 ; P5.14@141.721,91.095 ccw(c141.721,92.69) 142.849,91.562 ccw(c143.976,90.435) P5.14@142.382,90.435 ; v1(161.29,157.861) 162.433,159.004 203.064,159.004 206.439,162.379 223.066,162.379 227.711,157.734 U10.2@239.268,157.734 U10.3@239.268,156.464 ; 165.783,101.66 ccw(c165.462,101.981) v1@165.916,101.981 ; U10.2@238.625,157.599 ccw(c238.3,157.274) 238.3,157.734 ccw(c238.3,158.194) U10.2@238.625,157.869 ; U10.3@239.133,156.599 ccw(c238.808,156.924) 239.268,156.924 ccw(c239.728,156.924) U10.3@239.403,156.599 ; U10.2@239.133,157.599 cw(c238.808,157.274) 239.268,157.274 cw(c239.728,157.274) U10.2@239.403,157.599
  Bottom Layer w0.254: v1(161.29,157.861) 163.449,155.702 163.449,144.897 163.795,144.551 163.795,137.884 163.533,137.622 163.533,131.526 163.284,131.277 163.284,130.089 163.668,129.705 163.668,124.164 163.284,123.78 163.284,109.22 163.322,109.22 164.807,107.735 164.807,103.671 165.989,102.489 v1(165.989,101.981)
"PWM AUDIO": P3.2 R13.1 | length 82.9
  Top Layer w0.254: v1(233.553,76.708) 234.546,76.708 235.152,77.314 249.838,77.314 253.365,73.787 261.239,73.787 P3.2@263.144,75.692 ; P3.2@262.521,75.692 cw(c261.017,75.692) 262.08,74.628 cw(c263.144,73.565) P3.2@263.144,75.069 ; P3.2@262.775,75.692 cw(c261.884,75.692) 262.514,75.062 cw(c263.144,74.432) P3.2@263.144,75.323
  Top Layer w0.5: v1(233.172,122.682) R13.1@233.172,123.774
  Bottom Layer w0.5: v1(233.172,122.682) 233.161,122.671 233.161,77.1 v1@233.426,76.835
"RADIO L": R11.1 U4.16 | length 8.6
  Top Layer w0.254: v1(232.156,145.415) 232.241,145.5 233.057,145.5 U4.16@233.103,145.546 U4.16@233.099,145.542 ; v1@232.208,145.363 cw(c232.537,145.034) 232.537,145.5 ; R11.1@232.484,140.057 ccw(c232.051,140.491) 232.664,140.491 ccw(c233.277,140.491) R11.1@232.844,140.057 ; v1@232.485,141.045 cw(c232.054,140.614) 232.664,140.614 ; v1(232.537,141.097) 232.664,140.97 R11.1@232.664,139.878
  Bottom Layer w0.254: v1(232.156,145.415) 232.156,141.478 v1(232.537,141.097)
"RADIO R": R12.1 U4.15 | length 9.5
  Top Layer w0.254: v1(230.505,145.161) 231.394,146.05 233.099,146.05 U4.15@233.103,146.046 ; v1(230.886,141.224) 231.14,140.97 R12.1@231.14,139.878 ; R12.1@230.96,140.057 ccw(c230.527,140.491) 231.14,140.491 ccw(c231.753,140.491) R12.1@231.32,140.057
  Bottom Layer w0.254: v1(230.505,145.161) 230.505,141.605 v1(230.886,141.224)
RESET: 2.4/2.8LCD.5 C51.2 D7.1 JTAG.15 R32.1 RESET.1 U6.25 | length 296.8
  Top Layer w0.254: JTAG.15@118.618,115.57 122.294,115.57 122.748,116.024 125.927,116.024 126.12,115.831 126.12,115.249 128.025,113.345 128.97,113.345 129.987,112.328 129.987,111.822 130.684,111.125 137.922,111.125 v1(138.557,110.49) ; JTAG.15@118.916,115.309 cw(c119.546,114.679) 119.546,115.57 cw(c119.546,116.461) JTAG.15@118.916,115.831 ; JTAG.15@119.096,115.129 cw(c120.159,114.066) 120.159,115.57 cw(c120.159,117.074) JTAG.15@119.096,116.011 ; D7.1@136.144,97.536 136.271,97.409 v1(138.176,97.409) ; D7.1@136.434,97.726 ccw(c137.2,98.492) 137.2,97.409 ccw(c137.2,96.58) D7.1@136.614,97.166 ; D7.1@136.614,97.906 ccw(c137.813,99.105) 137.813,97.409 ; 139.192,70.104 v1(139.336,70.248) 139.341,70.253 169.85,70.253 169.86,70.243 171.008,70.243 171.018,70.253 176.896,70.253 182.487,64.662 185.957,64.662 186.03,64.735 204.378,64.735 v1(205.486,63.627) ; v1(146.685,109.22) 158.369,109.22 160.528,107.061 178.641,107.061 U6.25@183.751,101.95 U6.25@183.72,101.95 ; RESET.1@216.916,65.532 RESET.1@223.416,65.532 ; RESET.1@217.203,65.245 cw(c217.897,64.551) 217.897,65.532 cw(c217.897,66.513) RESET.1@217.203,65.819 ; RESET.1@217.383,65.065 cw(c218.51,63.938) 218.51,65.532 cw(c218.51,67.126) RESET.1@217.383,65.999 ; R32.1@221.158,67.564 222.885,67.564 223.214,67.235 ; R32.1@221.337,67.384 cw(c221.771,66.951) 221.771,67.564 cw(c221.771,68.177) R32.1@221.337,67.744 ; RESET.1@222.949,65.065 ccw(c221.822,63.938) 221.822,65.532 ccw(c221.822,67.126) 222.949,65.999 ccw(c222.309,66.639) 223.214,66.639 ; RESET.1@223.129,65.245 ccw(c222.435,64.551) 222.435,65.532 ccw(c222.435,66.513) RESET.1@223.129,65.819 ; 223.214,66.733 ccw(c224.298,66.733) RESET.1@223.656,65.86 ; RESET.1@223.416,64.872 cw(c223.416,63.277) 224.543,64.405 cw(c225.671,65.532) RESET.1@224.076,65.532 ; RESET.1@223.416,65.126 cw(c223.416,64.144) 224.11,64.838 cw(c224.804,65.532) RESET.1@223.822,65.532 ; RESET.1@223.807,66.064 cw(c224.666,67.235) 223.214,67.235 ; 224.462,64.486 cw(c223.667,63.691) C51.2@224.792,63.691 ; C51.2@224.896,64.052 cw(c224.534,63.691) C51.2@225.046,63.691 225.046,63.902 RESET.1@223.416,65.532 ; 223.214,67.235 223.214,65.734 RESET.1@223.416,65.532
  Bottom Layer w0.254: v1(138.557,110.49) 138.557,109.22 v1@139.001,108.775 ; 138.724,108.498 cw(c139.065,108.156) v1@139.065,108.639 ; v1@139.138,108.712 cw(c139.621,108.712) 139.279,109.053 ; v1(139.336,70.248) 139.336,96.249 v1(138.176,97.409) 138.176,107.95 v1@139.001,108.775 ; 146.245,109.329 cw(c146.245,108.78) v1@146.633,109.168 ; v1(146.685,109.22) 146.576,109.329 139.936,109.329 139.827,109.22 139.446,109.22 v1@139.001,108.775 ; 2.4/2.8LCD.5@161.585,150.917 cw(c160.458,149.79) 162.052,149.79 cw(c163.646,149.79) 2.4/2.8LCD.5@162.519,150.917 ; 2.4/2.8LCD.5@161.765,151.097 cw(c161.071,150.403) 162.052,150.403 cw(c163.033,150.403) 2.4/2.8LCD.5@162.339,151.097 ; 2.4/2.8LCD.5@162.052,151.384 162.052,145.652 163.341,144.363 163.341,138.072 163.079,137.81 163.079,131.714 162.83,131.465 162.83,125.443 163.214,125.059 163.214,124.352 162.56,123.698 162.56,107.442 162.941,107.061 v1(163.195,107.061) ; 162.687,107.315 ccw(c163.131,107.759) v1@163.188,107.134 ; v1(205.486,63.627) 205.486,60.325 206.944,58.867 214.188,58.867 215.519,60.198 215.519,64.135 RESET.1@216.916,65.532 ; RESET.1@216.256,65.532 cw(c214.661,65.532) 215.789,64.405 cw(c216.916,63.277) RESET.1@216.916,64.872 ; RESET.1@216.51,65.532 cw(c215.528,65.532) 216.222,64.838 cw(c216.916,64.144) RESET.1@216.916,65.126
  other v1: 139.065,108.712
"RS485 RX": P9.6 U10.1 | length 18.1
  Top Layer w0.254: P9.6@228.667,154.873 ccw(c227.604,155.936) 229.108,155.936 ccw(c230.612,155.936) P9.6@229.549,154.873 ; P9.6@228.847,154.693 ccw(c228.217,155.323) 229.108,155.323 ccw(c229.999,155.323) P9.6@229.369,154.693 ; P9.6@229.108,154.432 v1(229.108,156.083) ; v1(237.49,159.004) U10.1@239.268,159.004 ; U10.1@238.625,158.869 ccw(c238.3,158.544) 238.3,159.004 ccw(c238.3,159.464) U10.1@238.625,159.139
  Bottom Layer w0.254: v1(229.108,156.083) 229.362,156.083 232.283,159.004 v1(237.49,159.004) ; v1@229.108,156.156 ccw(c229.108,156.945) 229.666,156.387
"RS485 TX": P9.5 U10.4 | length 16
  Top Layer w0.254: P9.5@229.108,151.892 231.14,151.892 234.442,155.194 U10.4@239.268,155.194 ; P9.5@229.369,151.631 cw(c229.999,151.001) 229.999,151.892 cw(c229.999,152.783) P9.5@229.369,152.153 ; P9.5@229.549,151.451 cw(c230.612,150.388) 230.612,151.892 cw(c230.612,153.396) P9.5@229.549,152.333 ; U10.4@238.625,155.059 ccw(c238.3,154.734) 238.3,155.194 ccw(c238.3,155.654) U10.4@238.625,155.329
RXD: P6.4 U18.3 | length 39.2
  Top Layer w0.254: v1(124.841,75.311) 124.931,75.221 127.816,75.221 128.651,76.056 U18.3@128.651,76.648 ; v1@124.893,75.363 ccw(c125.234,75.704) 125.234,75.221 ; 128.001,75.406 cw(c128.651,74.756) U18.3@128.651,75.675
  Bottom Layer w0.254: v1@124.841,75.184 126.746,75.184 127.743,76.181 127.743,90.896 128.524,91.677 P6.4@128.524,101.6 ; v1@124.893,75.363 ccw(c125.324,75.794) 125.324,75.184 ; P6.4@128.083,101.159 cw(c127.02,100.096) 128.524,100.096 cw(c130.028,100.096) P6.4@128.965,101.159 ; P6.4@128.263,101.339 cw(c127.633,100.709) 128.524,100.709 cw(c129.415,100.709) P6.4@128.785,101.339
SCLK: P1.3 U3.11 | length 16.7
  Top Layer w0.254: U3.11@226.727,111.396 229.218,111.396 231.394,109.22 P1.3@238.76,109.22 ; P1.3@238.319,108.779 ccw(c237.256,107.716) 237.256,109.22 ccw(c237.256,110.724) P1.3@238.319,109.661 ; P1.3@238.499,108.959 ccw(c237.869,108.329) 237.869,109.22 ccw(c237.869,110.111) P1.3@238.499,109.481
"SD CMD": P10.4 R51.2 SD_CARD.2 | length 58.7
  Top Layer w0.254: P10.4@126.492,131.953 127.569,133.03 127.569,135.194 v1(127.381,135.382) ; P10.4@126.492,132.322 ccw(c126.492,133.213) 127.122,132.583 ccw(c127.752,131.953) P10.4@126.861,131.953 ; P10.4@126.492,132.576 ccw(c126.492,134.08) 127.556,133.017 ccw(c128.619,131.953) P10.4@127.115,131.953 ; v1@127.329,135.33 cw(c126.751,134.752) 127.569,134.752 ; v1(127.889,159.131) 135.382,159.131 v1(135.382,158.75) ; v1(143.256,155.194) 144.08,155.194 R51.2@144.589,155.704 ; R51.2@144.335,155.704 cw(c143.722,155.704) 144.156,155.27 cw(c144.589,154.836) R51.2@144.589,155.45
  Bottom Layer w0.254: 127.254,135.865 ccw(c127.864,135.865) v1@127.433,135.434 ; v1(127.381,135.382) 127.254,135.509 127.254,150.869 127.428,151.043 127.428,153.319 127.473,153.364 127.473,154.711 127.254,154.93 127.254,158.496 v1(127.889,159.131) ; v1(135.382,158.75) 135.509,158.877 136.15,158.877 136.404,159.131 137.033,159.131 137.287,158.877 137.287,156.896 SD_CARD.2@138.684,155.499 139.497,154.686 142.748,154.686 v1(143.256,155.194) ; v1@135.434,158.698 cw(c135.865,158.267) 135.865,158.877 ; 137.364,156.818 cw(c136.045,155.499) SD_CARD.2@137.911,155.499 ; 137.798,156.385 cw(c136.912,155.499) SD_CARD.2@138.165,155.499 ; SD_CARD.2@138.089,156.094 ccw(c138.384,156.389) SD_CARD.2@138.384,155.972 ; SD_CARD.2@138.984,155.026 cw(c138.984,154.608) SD_CARD.2@139.279,154.903 ; SD_CARD.2@139.337,155.184 ccw(c139.526,155.015) 139.347,154.836
"SD DT0": P10.2 R50.2 SD_CARD.7 | length 59.5
  Top Layer w0.254: v1(116.459,143.129) v1(136.779,143.129) ; v1(117.602,133.477) 117.729,133.35 120.015,133.35 P10.2@121.412,131.953 ; v1@117.654,133.529 ccw(c118.085,133.96) 118.085,133.35 ; P10.2@120.789,131.953 ccw(c119.285,131.953) 120.348,133.017 ccw(c121.412,134.08) P10.2@121.412,132.576 ; P10.2@121.043,131.953 ccw(c120.152,131.953) 120.782,132.583 ccw(c121.412,133.213) P10.2@121.412,132.322 ; v1(143.129,151.765) 143.891,152.527 ; R50.2@144.375,152.792 cw(c143.891,153.102) 143.891,152.527 ; R50.2@144.589,152.656 144.461,152.527 143.891,152.527
  Bottom Layer w0.254: v1(116.459,143.129) 117.602,141.986 v1(117.602,133.477) v1@117.729,133.35 ; v1(136.779,143.129) 138.626,143.129 SD_CARD.7@138.675,143.08 138.724,143.129 140.044,143.129 ; 137.115,143.129 cw(c137.115,141.82) SD_CARD.7@138.04,142.746 ; 137.351,143.129 ccw(c137.351,144.104) SD_CARD.7@138.04,143.414 ; 137.728,143.129 cw(c137.728,142.433) SD_CARD.7@138.22,142.925 ; SD_CARD.7@139.309,143.414 ccw(c139.998,144.104) 139.998,143.129 ; SD_CARD.7@139.348,142.789 cw(c140.044,142.246) 140.044,143.129 ; v1(143.129,151.765) 140.843,149.479 140.843,146.812 141.605,146.05 141.605,144.69 140.044,143.129
"SD DT1": P10.1 R49.2 SD_CARD.8 | length 57.5
  Top Layer w0.254: v1@116.205,140.716 v1(116.224,140.697) v1(134.258,140.697) ; v1(143.383,150.749) 143.766,151.132 R49.2@144.589,151.132 ; R49.2@144.41,150.952 ccw(c143.976,150.518) 143.976,151.132 ccw(c143.976,151.745) R49.2@144.41,151.311
  Bottom Layer w0.254: v1(116.224,140.697) 116.224,138.691 116.577,138.339 116.577,136.376 115.897,135.697 115.447,135.697 114.935,135.185 114.935,132.588 115.57,131.953 P10.1@118.872,131.953 ; P10.1@118.431,131.512 ccw(c117.368,130.449) 117.368,131.953 ccw(c117.368,133.457) P10.1@118.431,132.394 ; P10.1@118.611,131.692 ccw(c117.981,131.062) 117.981,131.953 ccw(c117.981,132.844) P10.1@118.611,132.214 ; v1@134.239,140.716 v1(134.258,140.697) 136.125,140.697 136.804,141.376 SD_CARD.8@138.684,141.376 138.934,141.376 142.367,144.81 142.367,148.717 143.383,149.733 v1(143.383,150.749) ; SD_CARD.8@138.035,141.077 ccw(c137.313,140.355) 137.313,141.376 ccw(c137.313,142.398) SD_CARD.8@138.035,141.676 ; SD_CARD.8@139.034,141.799 ccw(c139.034,142.578) 139.585,142.028 ; SD_CARD.8@139.203,141.376 cw(c139.853,141.376) SD_CARD.8@139.393,141.836 ; SD_CARD.8@139.457,141.376 cw(c140.72,141.376) 139.827,142.27
"SD DT2": P10.6 R53.2 SD_CARD.9 | length 52.9
  Top Layer w0.254: P10.6@131.572,131.953 134.62,131.953 135.189,132.522 135.189,135.956 134.112,137.033 v1(132.715,137.033) ; P10.6@131.833,131.692 cw(c132.463,131.062) 132.463,131.953 cw(c132.463,132.844) P10.6@131.833,132.214 ; P10.6@132.013,131.512 cw(c133.076,130.449) 133.076,131.953 cw(c133.076,133.457) P10.6@132.013,132.394 ; v1(140.208,159.893) 141.859,159.893 143,158.752 R53.2@144.589,158.752 ; R53.2@144.41,158.572 ccw(c143.976,158.138) 143.976,158.752 ccw(c143.976,159.365) R53.2@144.41,158.931
  Bottom Layer w0.254: v1(132.715,137.033) 132.715,152.402 134.855,154.542 134.855,158.968 135.218,159.331 135.962,159.331 137.136,160.505 SD_CARD.9@138.675,160.505 139.596,160.505 v1(140.208,159.893) ; SD_CARD.9@138.04,160.171 ccw(c137.233,159.363) 137.233,160.505 ccw(c137.233,161.647) SD_CARD.9@138.04,160.839 ; SD_CARD.9@138.969,160.539 cw(c139.142,159.579) 139.832,160.269 ; SD_CARD.9@139.014,160.289 cw(c139.247,158.997) v1@140.175,159.926
"SD DT3": P10.5 R52.2 SD_CARD.1 | length 50.4
  Top Layer w0.254: v1(131.064,157.734) 135.145,157.734 136.669,159.258 v1(138.684,159.258) ; v1(140.335,157.988) 143.829,157.988 R52.2@144.589,157.228 ; R52.2@144.335,157.228 ccw(c143.722,157.228) 144.156,157.661 ccw(c144.589,158.095) R52.2@144.589,157.482
  Bottom Layer w0.254: P10.5@129.032,131.953 130.049,131.953 ; P10.5@129.587,131.67 cw(c130.049,131.435) 130.049,131.953 ; P10.5@129.587,132.236 ccw(c130.049,132.471) 130.049,131.953 ; v1(131.064,157.734) 131.064,141.478 131.826,140.716 131.826,136.52 132.649,135.697 132.649,134.174 131.505,133.03 131.126,133.03 130.049,131.953 ; SD_CARD.1@138.35,158.322 ccw(c137.542,159.13) 138.684,159.13 ccw(c139.826,159.13) SD_CARD.1@139.018,158.322 ; v1@138.557,159.385 v1(138.684,159.258) SD_CARD.1@138.684,157.988 v1(140.335,157.988) ; SD_CARD.1@139.318,157.654 cw(c140.126,156.846) 140.126,157.988 cw(c140.126,159.13) SD_CARD.1@139.318,158.322
"SD SCK": P10.3 SD_CARD.5 | length 36.6
  Top Layer w0.254: v1(125.349,148.209) 125.553,148.005 v1(136.829,148.005) ; v1@125.401,148.261 ccw(c126.018,148.878) 126.018,148.005
  Bottom Layer w0.254: P10.3@123.952,131.953 125.349,133.35 v1(125.349,148.209) ; P10.3@123.952,132.322 ccw(c123.952,133.213) 124.582,132.583 ccw(c125.212,131.953) P10.3@124.321,131.953 ; P10.3@123.952,132.576 ccw(c123.952,134.08) 125.016,133.017 ccw(c126.079,131.953) P10.3@124.575,131.953 ; v1@136.779,147.955 v1(136.829,148.005) SD_CARD.5@138.675,148.005 ; SD_CARD.5@138.04,147.671 ccw(c137.233,146.863) 137.233,148.005 ccw(c137.233,149.147) SD_CARD.5@138.04,148.339
SDIN: P1.2 U3.12 | length 17.2
  Top Layer w0.254: U3.12@226.727,111.896 229.861,111.896 231.596,110.161 234.875,110.161 236.474,111.76 P1.2@238.76,111.76 ; P1.2@238.319,111.319 ccw(c237.256,110.256) 237.256,111.76 ccw(c237.256,113.264) P1.2@238.319,112.201 ; P1.2@238.499,111.499 ccw(c237.869,110.869) 237.869,111.76 ccw(c237.869,112.651) P1.2@238.499,112.021
TPAD: P14.1 R59.1 | length 22.1
  Top Layer w0.254: v1(256.667,66.421) 260.096,66.421 261.239,67.564 v1(261.239,68.707) 264.287,68.707 P14.1@266.192,70.612 ; R59.1@257.734,74.676 v1(260.858,74.676) ; R59.1@257.913,74.496 cw(c258.347,74.063) 258.347,74.676 cw(c258.347,75.289) R59.1@257.913,74.856
  Bottom Layer w0.254: v1(260.858,74.676) 260.858,69.088 v1(261.239,68.707)
TXD: P6.2 U18.2 | length 32.1
  Top Layer w0.254: U18.2@127.259,77.57 ccw(c126.963,77.866) 127.381,77.866 ccw(c127.799,77.866) U18.2@127.503,77.57 ; U18.2@127.381,76.648 127.381,78.232 127.635,78.486 v1(129.032,78.486)
  Bottom Layer w0.254: 128.651,79.502 128.778,79.629 ; v1(129.032,78.486) 128.778,78.74 128.778,79.629 ; P6.2@130.623,101.159 cw(c129.56,100.096) 131.064,100.096 cw(c132.568,100.096) P6.2@131.505,101.159 ; P6.2@130.803,101.339 cw(c130.173,100.709) 131.064,100.709 cw(c131.955,100.709) P6.2@131.325,101.339 ; P6.2@131.064,101.6 131.064,88.375 130.664,87.975 130.664,81.515 128.778,79.629
"USART RX": P9.2 U8.12 | length 16.6
  Top Layer w0.254: U8.12@214.381,156.43 ccw(c214.085,156.726) 214.503,156.726 ccw(c214.921,156.726) U8.12@214.625,156.43 ; U8.12@214.503,155.508 214.503,156.845 214.884,157.226 218.457,157.226 221.251,154.432 P9.2@224.028,154.432 ; P9.2@223.587,153.991 ccw(c222.524,152.928) 222.524,154.432 ccw(c222.524,155.936) P9.2@223.587,154.873 ; P9.2@223.767,154.171 ccw(c223.137,153.541) 223.137,154.432 ccw(c223.137,155.323) P9.2@223.767,154.693
"USART TX": P9.1 U8.11 | length 14.9
  Top Layer w0.254: U8.11@215.651,154.586 cw(c215.355,154.29) 215.773,154.29 cw(c216.191,154.29) U8.11@215.895,154.586 ; U8.11@215.773,155.508 215.773,154.178 218.059,151.892 P9.1@224.028,151.892 ; P9.1@223.587,151.451 ccw(c222.524,150.388) 222.524,151.892 ccw(c222.524,153.396) P9.1@223.587,152.333 ; P9.1@223.767,151.631 ccw(c223.137,151.001) 223.137,151.892 ccw(c223.137,152.783) P9.1@223.767,152.153